# Altium PCB amigaDIP40_v0.7_65816_2025-07-20.pcbdoc (part 1 of 2)
Units mm, origin at the board's own origin, x right, y up, seen from the top; angles counter-clockwise.
Board outline 96.27 x 48.65 mm, 2 copper layers (Top Layer, Bottom Layer); 37 components, 74 nets, 264 pads, 133 vias.
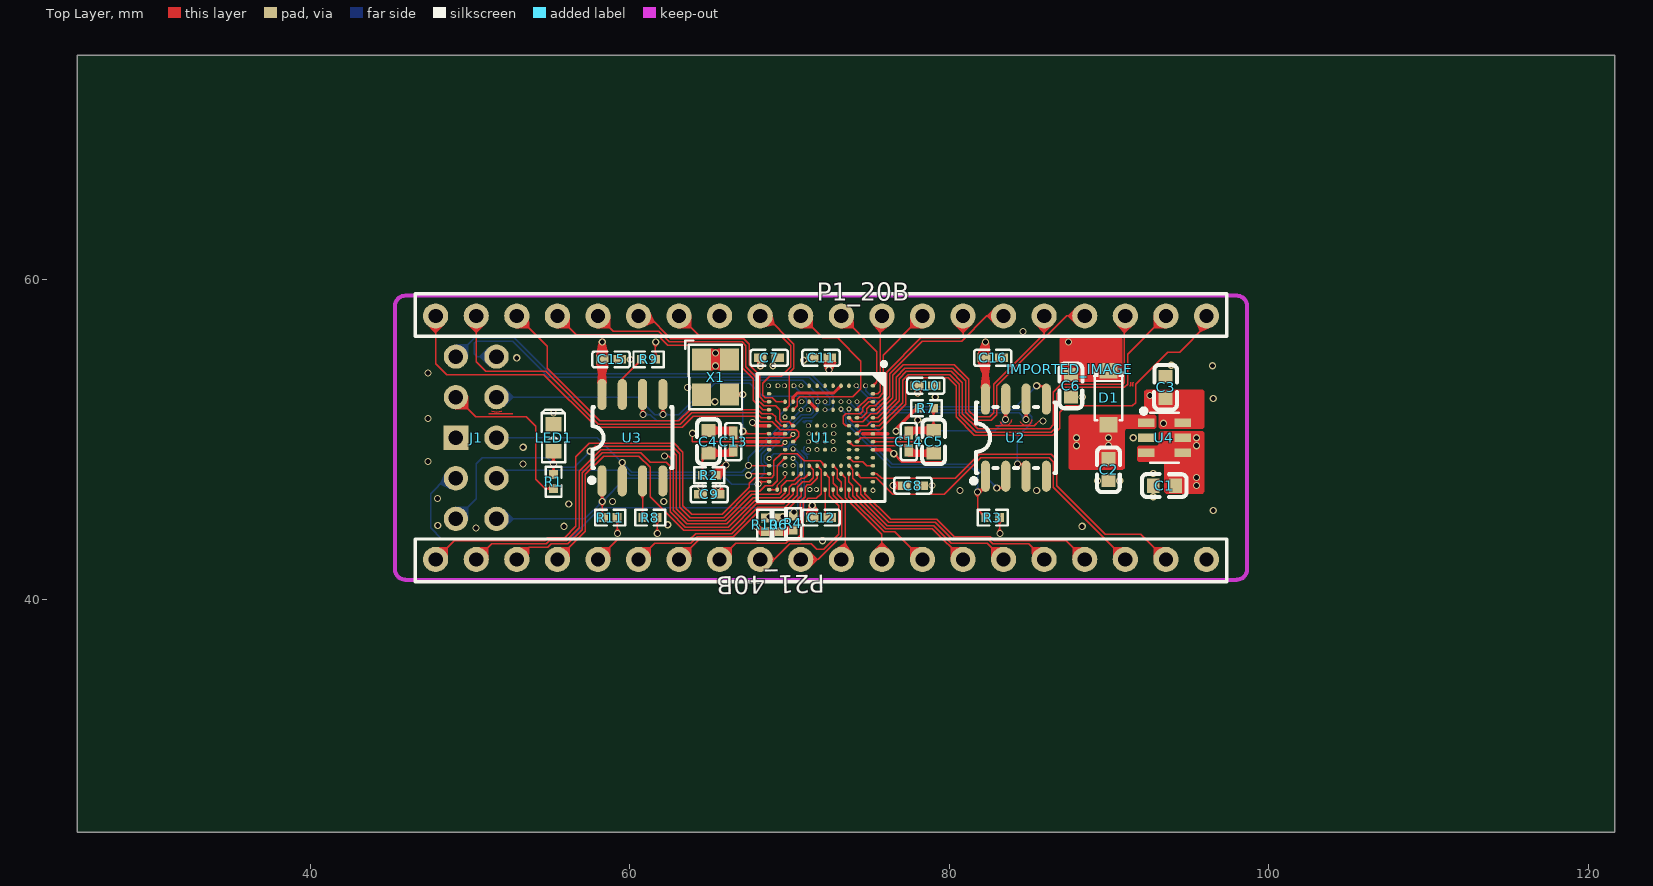
[diagram p0: Top Layer view]
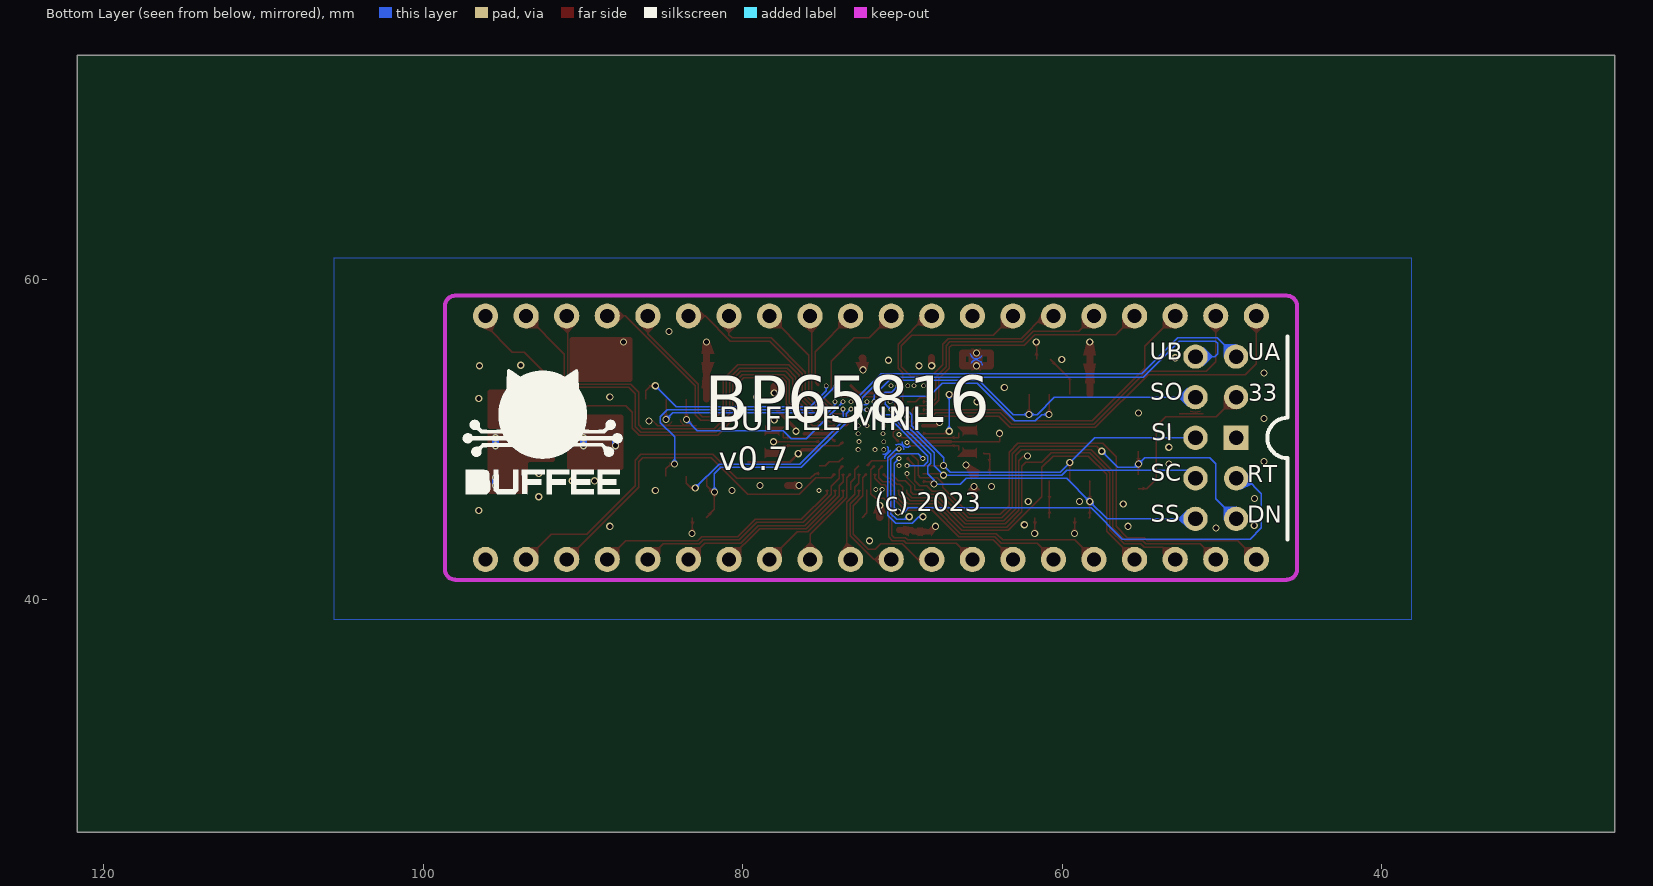
[diagram p1: Bottom Layer view, seen from below]

## Layer stack, top to bottom
Top Layer: signal copper (thickness not stored)
Dielectric: dielectric 0.32, FR-4, Dk 4.8
Bottom Layer: signal copper (thickness not stored)

## Board outline
121.675,25.4 25.4,25.4 25.4,74.05 121.675,74.05

## Components (designator, comment, footprint, x,y, rotation, side; value= is the part's Value field where it differs from the comment)
C1 "4.7u" C0603 93.475,47.1 r0 top
C2 "4.7u" C0603 89.975,48.1 r90 top
C3 "4.7u" C0603 93.545,53.252 r270 top
C4 "4.7u" C0603 64.925,49.85 r270 top
C5 "4.7u" C0603 79.025,49.85 r90 top
C6 "4.7u" C0603 87.625,53.35 r90 top
C7 "0.10u" C0402 68.725,55.1 r180 top
C8 "0.10u" C0402 77.725,47.1 r180 top
C9 "0.10u" C0402 64.975,46.55 r0 top
C10 "0.10u" C0402 78.527,53.351 r180 top
C11 "0.10u" C0402 71.975,55.1 r0 top
C12 "0.10u" C0402 71.975,45.1 r180 top
C13 "0.10u" C0402 66.475,49.85 r270 top
C14 "0.10u" C0402 77.475,49.85 r90 top
C15 "0.10u" C0402 58.825,55 r180 top
C16 "0.10u" C0402 82.725,55.1 r180 top
D1 "MBR130" SOD-123_L2.8-W1.8-LS3.7-RD 89.975,52.6 r270 top
IMPORTED_IMAGE "IMPORTED_IMAGE" IMPORTED_IMAGE 87.537,54.39 r0 top
J1 "HDR-M-2.54_2x5" ICE_PROG 50.385,50.1 r0 top
LED1 "LED-0603_R" LED0603_RED 55.225,50.1 r90 top
P1_20B "HDR-M-2.54_1x20" HDR-M-2.54_1X20 71.975,57.72 r0 top
P21_40B "HDR-M-2.54_1x20" HDR-M-2.54_1X20 71.975,42.48 r180 top
R1 "2K2" R0402 55.225,47.35 r270 top
R2 "100" R0402 64.975,47.75 r180 top
R3 "10K" R0402 82.725,45.1 r180 top
R4 "10K" R0402 70.225,44.75 r90 top
R6 "10K" R0402 69.325,44.65 r90 top
R7 "100" R0402 78.575,51.95 r0 top
R8 "10K" R0402 61.275,45.1 r180 top
R9 "10K" R0402 61.175,55 r180 top
R10 "10K" R0402 68.475,44.65 r90 top
R11 "10K" R0402 58.775,45.1 r180 top
U1 "iCE65L-iCE40HX-TCB132C" LATC-CSBGA-132 71.975,50.1 r270 top
U2 "IS66WVS4M8BLL-104NLI" SOIC-8_L4.9-W3.9-P1.27-LS6.1-BL 84.175,50.1 r0 top
U3 "W25X40CLSNIG" SOIC-8_L5.0-W4.0-P1.27-LS6.0-BL 60.164,50.1 r0 top
U4 "AP7312-1233W6-7" SOT-26_L3.0-W1.6-P0.95-LS2.8-BR 93.475,50.1 r180 top
X1 "100MHz" OSC-SMD_4P-L3.2-W2.5-BL 65.375,53.9 r270 top

## Footprints (in the part's own frame and the unit in brackets; to place one, negate y for a bottom-side part, rotate by r counter-clockwise, add the part's x,y. Pads: shape width x height; smd on the part's side, far side on the other; paste and mask are expansions set on the pad)
C0402 [mm]
  rect 0.79x0.54 smd paste-100 mask+0.051: 1(-0.545,0) 2(0.545,0)
  silkscreen extent -1.17,-0.5 1.17,0.5
C0603 [mm]
  rect 0.8x0.9 smd paste+0 mask+0.051: 1(-0.7,0) 2(0.7,0)
  silkscreen extent -1.41,-0.71 1.39,0.72
HDR-M-2.54_1X20 [mil]
  round 62 hole 35 paste+0 mask+2: 1(-950,0) 2(-850,0) 3(-750,0) 4(-650,0) 5(-550,0) 6(-450,0) 7(-350,0) 8(-250,0) 9(-150,0) 10(-50,0) 11(50,0) 12(150,0) 13(250,0) 14(350,0) 15(450,0) 16(550,0) 17(650,0) 18(750,0) 19(850,0) 20(950,0)
  silkscreen extent -1000,-50 1000,55
ICE_PROG [mil]
  round 60 hole 36 paste+0 mask+2: 1(-50,-200) 2(50,-200) 3(-50,-100) 4(50,-100) 6(50,0) 7(-50,100) 8(50,100) 9(-50,200) 10(50,200)
  rect 62x60 hole 36 paste+0 mask+2: 5(-49.99,0)
IMPORTED_IMAGE [mm]
LATC-CSBGA-132 [mil]
  oval 8.7x11.3 smd paste+0 mask+3: A1(-127.95,127.95) A2(-108.27,127.95) A3(-88.58,127.95) A4(-68.9,127.95) A5(-49.21,127.95) A6(-29.53,127.95) A7(-9.84,127.95) A8(9.84,127.95) A9(29.53,127.95) A10(49.21,127.95) A11(68.9,127.95) A12(88.58,127.95) A13(108.27,127.95) C3(-88.58,88.58) C4(-68.9,88.58) C5(-49.21,88.58) C6(-29.53,88.58) C7(-9.84,88.58) C8(9.84,88.58) C9(29.53,88.58) C10(49.21,88.58) C11(68.9,88.58) D4(-68.9,68.9) D5(-49.21,68.9) D6(-29.53,68.9) D7(-9.84,68.9) D8(9.84,68.9) D9(29.53,68.9) D10(49.21,68.9) L5(-49.21,-68.9) L6(-29.53,-68.9) L7(-9.84,-68.9) L8(9.84,-68.9) L9(29.53,-68.9) L10(49.21,-68.9) L11(68.9,-68.9) M4(-68.9,-88.58) M5(-49.21,-88.58) M6(-29.53,-88.58) M7(-9.84,-88.58) M8(9.84,-88.58) M9(29.53,-88.58) M10(49.21,-88.58) M11(68.9,-88.58) M12(88.58,-88.58) P2(-108.27,-127.95) P3(-88.58,-127.95) P4(-68.9,-127.95) P5(-49.21,-127.95) P6(-29.53,-127.95) P7(-9.84,-127.95) P8(9.84,-127.95) P9(29.53,-127.95) P10(49.21,-127.95) P11(68.9,-127.95) P12(88.58,-127.95) P13(108.27,-127.95) P14(127.95,-127.95)
  oval 11.3x8.7 smd paste+0 mask+3: A14(127.95,127.95) B1(-127.95,108.27) B14(127.95,108.27) C1(-127.95,88.58) C12(88.58,88.58) C14(127.95,88.58) D1(-127.95,68.9) D3(-88.58,68.9) D11(68.9,68.9) D12(88.58,68.9) D14(127.95,68.9) E1(-127.95,49.21) E3(-88.58,49.21) E4(-68.9,49.21) E11(68.9,49.21) E12(88.58,49.21) E14(127.95,49.21) F1(-127.95,29.53) F3(-88.58,29.53) F4(-68.9,29.53) F11(68.9,29.53) F12(88.58,29.53) F14(127.95,29.53) G1(-127.95,9.84) G3(-88.58,9.84) G4(-68.9,9.84) G11(68.9,9.84) G12(88.58,9.84) G14(127.95,9.84) H1(-127.95,-9.84) H3(-88.58,-9.84) H4(-68.9,-9.84) H11(68.9,-9.84) H12(88.58,-9.84) H14(127.95,-9.84) J1(-127.95,-29.53) J3(-88.58,-29.53) J4(-68.9,-29.53) J11(68.9,-29.53) J12(88.58,-29.53) J14(127.95,-29.53) K1(-127.95,-49.21) K3(-88.58,-49.21) K4(-68.9,-49.21) K11(68.9,-49.21) K12(88.58,-49.21) K14(127.95,-49.21) L1(-127.95,-68.9) L3(-88.58,-68.9) L4(-68.9,-68.9) L12(88.58,-68.9) L14(127.95,-68.9) M1(-127.95,-88.58) M3(-88.58,-88.58) M14(127.95,-88.58) N1(-127.95,-108.27) N14(127.95,-108.27) P1(-127.95,-127.95)
  round 10 smd paste+0 mask+3: F6(-29.53,29.53) F7(-9.84,29.53) F8(9.84,29.53) F9(29.53,29.53) G6(-29.53,9.84) G7(-9.84,9.84) G8(9.84,9.84) G9(29.53,9.84) H6(-29.53,-9.84) H7(-9.84,-9.84) H8(9.84,-9.84) H9(29.53,-9.84) J6(-29.53,-29.53) J7(-9.84,-29.53) J8(9.84,-29.53) J9(29.53,-29.53)
  silkscreen extent -187,-157 157,160
LED0603_RED [mm]
  rect 0.9x1 smd paste+0 mask+0.051: 1(-0.85,0) 2(0.85,0)
  silkscreen extent -1.54,-0.73 1.75,0.73
OSC-SMD_4P-L3.2-W2.5-BL [mm]
  rect 1.4x1.2 smd paste+0 mask+0.051: 1(-1.1,-0.875) 2(1.1,-0.875) 3(1.1,0.875) 4(-1.1,0.875)
  silkscreen extent -2.29,-1.9 2.03,1.65
R0402 [mm]
  rect 0.566x0.54 smd paste-100 mask+0.051: 1(-0.433,0) 2(0.433,0)
  silkscreen extent -0.94,-0.5 0.94,0.5
SOD-123_L2.8-W1.8-LS3.7-RD [mm]
  rect 0.95x1.15 smd paste+0 mask+0.051: 1(-1.693,0) 2(1.693,0)
  silkscreen extent -1.63,-0.94 1.41,0.94
SOIC-8_L4.9-W3.9-P1.27-LS6.1-BL [mil]
  oval 22.38x76.78 smd paste+0 mask+2: 1(-75,-95) 2(-25,-95) 3(25,-95) 4(75,-95) 5(75,95) 6(25,95) 7(-25,95) 8(-75,95)
  silkscreen extent -110,-112 98,87
SOIC-8_L5.0-W4.0-P1.27-LS6.0-BL [mil]
  oval 22.38x76.78 smd paste+0 mask+2: 1(-75,-106.5) 2(-25,-106.5) 3(25,-106.5) 4(75,-106.5) 5(75,106.5) 6(25,106.5) 7(-25,106.5) 8(-75,106.5)
  silkscreen extent -106,-111 98,75
SOT-26_L3.0-W1.6-P0.95-LS2.8-BR [mm]
  rect 1.04x0.532 smd paste+0 mask+0.051: 1(1.145,-0.95) 2(1.145,0) 3(1.145,0.95) 4(-1.145,0.95) 5(-1.145,0) 6(-1.145,-0.95)
  silkscreen extent -0.9,-1.82 1.45,1.56

## Via types
v1: diameter 0.45, hole 0.305, Top Layer to Bottom Layer, tented both sides, 93 vias
v2: diameter 0.305, hole 0.205, Top Layer to Bottom Layer, tented both sides, 40 vias

## Nets (pads, with @x,y where several pads share a name; then routed paths per layer and width w, separated by ;. In a path a pad name is that pad's centre, name@x,y a point inside that pad or via, vN(x,y) a via of type N, cw(c..) or ccw(c..) an arc to the next point about the centre after c; other vN are vias at no path point)
+1.2VDC: C3.2 C11.2 C12.2 R2.1 R7.1 U1.F8 U1.G6 U1.H9 U1.J4 U1.J7 U4.6 | length 68.2
  Top Layer w0.2: v1@76.676,50.499 76.676,50.651 77.977,51.949 R7.1@78.142,51.949
  Top Layer w0.4: R2.1@65.409,47.751 65.409,47.784 v1@66.026,48.401
  Top Layer w0.45: v1@71.424,45.848 C12.2@71.429,45.099 ; v1@72.475,54.349 72.475,55.099 C11.2@72.521,55.099
  Mid-Layer 1 w0.178: 70.808,46.257 ccw(c70.808,46.511) 71.062,46.511
  Mid-Layer 1 w0.356: v1(66.025,48.4) cw(c66.025,48) 66.425,48 66.425,47.05 ccw(c67.306,47.05) 67.306,46.169 71.751,46.169 ; 70.799,46.169 cw(c70.799,45.813) 71.155,45.813
  Mid-Layer 1 w0.4: v2(72.725,49.85) 75.076,49.85 ccw(c75.076,52.069) v1@76.645,50.5
  Mid-Layer 1 w0.5: 72.724,53.121 cw(c73.728,53.096) 73.789,54.098
  Mid-Layer 1 w0.8: 72.575,47.65 ccw(c74.172,47.553) 74.132,45.953
  Mid-Layer 1 w1: v1@71.475,45.851 84.411,45.851 84.726,45.851 ccw(c84.726,50.074) 87.713,47.088 ccw(c84.666,50.135) 88.975,50.135 88.975,50.174 cw(c89.801,50.174) 89.801,50.999 v1@93.425,50.999 ; 71.475,54.349 90.974,54.349 ; 90.976,54.349 cw(c90.976,52.75) v1(92.575,52.75)
  other v1: 71.425,45.849 76.676,50.5 93.425,51 72.475,54.35
  other v2: 71.725,49.35 71.225,50.35 72.225,50.85 71.175,51.85
+3.0VDC: C6.2 C15.2 C16.2 D1.1 R3.1 R8.1 R9.1 R11.1 U2.8 U3.8 | length 95.1
  Top Layer w0.09: R11.1@59.209,45.099 v1(59.225,44.1) ; R9.1@61.607,55 61.607,56.082 v1@61.624,56.1 ; R8.1@61.708,45.099 v1@61.726,44.101 ; R3.1@83.159,45.099 83.159,44.118 v1@83.176,44.101
  Top Layer w0.45: U3.8@58.259,52.805 58.259,56.084 v1@58.274,56.1 ; U2.8@82.27,52.513 82.27,56.1 v1@82.275,56.1
  Mid-Layer 1 w0.2: v1(59.225,44.1) v1(83.175,44.1) 94.625,44.1 ccw(c94.625,44.35) 94.875,44.35 94.875,55.9 ccw(c94.675,55.9) 94.675,56.1 v1(87.475,56.1)
  Mid-Layer 1 w0.6: v1(58.275,56.1) v1(87.475,56.1)
  other v1: 61.725,44.1 61.625,56.1 82.275,56.1
+3.3VDC: C2.2 C7.2 C8.2 C9.2 C10.2 D1.2 J1.7 R1.2 R4.1 R6.1 R10.1 U1.A8 U1.A14 U1.E3 U1.F6 U1.F9 U1.H14 U1.J6 U1.J9 U1.K1 U1.L11 U1.M5 U4.1 X1.1 X1.4 | length 52.4
  Top Layer w0.09: J1.7@49.115,52.64 50.354,51.401 53.524,51.401 54.124,50.801 54.124,47.499 54.708,46.917 R1.2@55.226,46.917
  Top Layer w0.1: U1.A8@75.225,49.85 75.226,49.849 v1@78.076,49.849
  Top Layer w0.356: v1@67.926,44.55 68.259,44.217 69.326,44.217 69.425,44.316 R4.1@70.225,44.316
  Top Layer w0.4: C9.2@65.521,46.549 65.526,46.554 v1@65.526,47.05
  Top Layer w0.45: v1(68.174,54.601) 68.18,54.607 C7.2@68.18,55.101 ; v1@76.476,47.1 C8.2@77.18,47.1 ; C10.2@77.982,53.351 78.026,53.306 v1(78.026,52.901) ; X1.1@64.5,54.601 65.376,54.601 66.25,54.601 66.25,55 66.25,55.401 65.376,55.401 64.5,55.401 64.5,55 X1.1@64.5,54.601
  Mid-Layer 1 w0.09: 69.475,48.184 cw(c69.725,48.35) 69.965,48.17 ; 73.527,53.516 cw(c73.775,53.35) 73.978,53.568 ; 73.996,53.588 cw(c74.175,53.35) 74.371,53.126 ; 74.609,53.102 cw(c74.775,53.35) 75.042,53.483 ; 67.447,50.5 ccw(c67.075,50.5) 67.447,50.5 ; 68.047,51.05 ccw(c67.675,51.05) 68.047,51.05 ; 68.397,47.2 ccw(c68.025,47.2) 68.397,47.2 ; 70.025,49.8 ccw(c69.725,49.8) 70.025,49.8 ; 70.525,48.8 ccw(c70.225,48.8) 70.525,48.8 ; 70.525,49.4 ccw(c70.225,49.4) 70.525,49.4 ; 70.525,50.3 ccw(c70.225,50.3) 70.525,50.3
  Mid-Layer 1 w0.3: 70.625,47.25 71.275,47.25 cw(c71.275,46.85) v2@71.675,46.85 ; 70.725,46.8 cw(c71.175,46.8) 71.175,47.25 ; 70.725,47.699 ccw(c71.175,47.7) 71.175,47.25 ; 70.725,48.9 cw(c71.175,48.9) v2(71.175,49.35) cw(c71.175,49.8) 70.725,49.8 ; 70.725,51.3 ccw(c71.175,51.3) v2(71.175,50.85) ; v2(72.775,49.35) cw(c72.775,48.9) 73.225,48.9 ; 73.225,50.4 ccw(c72.775,50.4) v2(72.775,50.85) ccw(c72.775,51.3) 73.225,51.3
  Mid-Layer 1 w0.4: 70.525,50.849 v2@71.175,50.849 ; v2(72.775,49.35) 73.425,49.351 ; v2@72.775,50.849 73.524,50.849
  Mid-Layer 2 w0.45: v1(87.975,49.6) v1(87.975,50.1) ; v1(89.975,49.6) v1(89.975,50.1)
  Bottom Layer w0.45: v1(87.975,49.6) v1(87.975,50.1) ; v1(89.975,49.6) v1(89.975,50.1)
  other v1: 67.925,44.55 65.525,47.05 76.475,47.1 78.075,49.85 65.375,54.6 65.375,55.4
  other v2: 75.225,46.8 71.675,46.85 70.225,48.35 69.725,51.4 73.225,52.35 70.725,53.35
+5.0VDC: C1.2 P1_20B.8 U4.3 U4.4 U4.5 | length 2
  Mid-Layer 2 w0.45: v1(95.475,47.101) v1(95.475,47.6) ; v1(95.475,49.6) v1(95.475,50.1)
  Bottom Layer w0.45: v1(95.475,47.101) v1(95.475,47.6) ; v1(95.475,49.6) v1(95.475,50.1)
CBSEL0: R10.2 U1.L9 | length 7.1
  Bottom Layer w0.09: v1@68.726,45.15 68.975,45.15 69.034,45.091 69.374,44.751 70.426,44.751 70.926,45.251 70.926,48.85 70.375,49.399 v2@70.225,49.399
  other v1: 68.725,45.15
  other v2: 70.225,49.4
CBSEL1: R6.2 U1.P10 | length 7.1
  Bottom Layer w0.09: v2@68.726,48.8 69.026,49.099 70.375,49.099 70.725,48.749 70.725,45.35 70.375,45 69.575,45 v1@69.575,45.15
  other v1: 69.575,45.15
  other v2: 68.725,48.8
CDONE: J1.1 LED1.1 R1.1 U1.M10 | length 31.6
  Top Layer w0.09: R1.1@55.226,47.784 55.226,48.449 LED1.1@55.226,49.249 ; v1@57.525,49.249 57.825,49.549 62.673,49.549 63.123,49.099 63.123,45.749 63.773,45.099 65.874,45.099 67.525,46.75 68.124,46.75 68.475,47.1 68.924,47.1 69.224,47.4 69.224,48.35 U1.M10@69.725,48.85
  Bottom Layer w0.09: J1.1@49.115,45.02 50.375,46.28 50.375,48.454 50.771,48.85 54.825,48.85 55.226,48.449 55.427,48.248 56.524,48.248 v1@57.525,49.249
  other v1: 55.225,48.45 57.525,49.25
CRESET_B: J1.3 R4.2 U1.L10 | length 31.7
  Bottom Layer w0.09: J1.3@49.115,47.56 48.485,47.56 47.525,46.6 47.525,44.451 48.226,43.75 56.227,43.75 58.178,45.701 69.625,45.701 69.874,45.449 70.276,45.449 70.525,45.7 70.525,48.5 v2(70.225,48.8)
  other v1: 70.275,45.45
DAT0: U1.B1 U2.5 | length 13.2
  Top Layer w0.09: v1@85.475,53.349 85.775,53.349 86.08,53.044 U2.5@86.08,52.513
  Bottom Layer w0.09: v2@74.774,53.349 74.774,53.049 75.775,52.051 84.175,52.051 v1@85.475,53.349
  other v1: 85.475,53.35
  other v2: 74.775,53.35
DAT1: U1.D4 U2.2 | length 12.9
  Top Layer w0.09: v1@82.973,46.948 83.225,46.948 83.54,47.263 U2.2@83.54,47.687
  Bottom Layer w0.09: v2(73.725,51.9) 73.725,51.152 76.425,48.449 81.477,48.449 v1@82.976,46.95
  other v1: 82.975,46.95
DAT2: U1.C1 U2.3 | length 16.3
  Top Layer w0.09: v1@84.274,48.449 84.525,48.449 84.81,48.165 U2.3@84.81,47.687
  Bottom Layer w0.09: v2@74.175,53.349 75.676,51.85 84.726,51.85 85.175,51.401 85.175,51.05 84.274,50.151 v1@84.274,48.449
  other v1: 84.275,48.45
  other v2: 74.175,53.35
DAT3: U1.D3 U2.7 | length 12.5
  Top Layer w0.09: v1(83.532,51.243) 83.532,52.505 U2.7@83.54,52.513
  Bottom Layer w0.09: v2(73.725,52.35) 76.026,50.049 76.976,50.049 77.477,50.55 82.839,50.55 v1(83.532,51.243)
DAT_CLK: U1.C3 U2.6 | length 12.4
  Top Layer w0.09: v1(84.802,51.243) 84.802,52.505 U2.6@84.81,52.513
  Bottom Layer w0.09: v2@74.225,52.35 74.225,52.15 74.726,51.649 84.396,51.649 v1(84.802,51.243)
  other v2: 74.225,52.35
DAT_EN: R3.2 U1.E4 U2.1 | length 14.8
  Top Layer w0.09: U2.1@82.27,47.687 82.27,47.095 81.873,46.699 81.774,46.699 81.774,45.617 R3.2@82.292,45.099
  Bottom Layer w0.09: v2(73.225,51.9) 73.524,51.601 73.524,51.05 76.326,48.248 81.375,48.248 81.774,47.85 v1@81.774,46.699
  other v1: 81.775,46.7
GND: C1.1 C2.1 C3.1 C6.1 C7.1 C8.1 C9.1 C10.1 C11.1 C12.1 C15.1 C16.1 J1.5 LED1.2 P21_40B.1 U1.A3 U1.A7 U1.A9 U1.A10 U1.A11 U1.C9 U1.C10 U1.D1 U1.D6 U1.D7 U1.D9 U1.D10 U1.E1 U1.E11 U1.E14 U1.F1 U1.F3 U1.F4 U1.F7 U1.F11 U1.G1 U1.G7 U1.G8 U1.G9 U1.G14 U1.H1 U1.H4 U1.H6 U1.H7 U1.H8 U1.J1 U1.J3 U1.J8 U1.J14 U1.K11 U1.L3 U1.L5 U1.L12 U1.M1 U1.M7 U1.M9 U1.M12 U1.M14 U1.N14 U1.P6 U1.P8 U1.P9 U1.P14 U2.4 U3.4 U4.2 X1.2 | length 61.5
  Top Layer w0.09: 51.177,51.596 52.676,51.596 ; 51.346,51.756 ccw(c51.655,52.64) 51.972,51.759 ; v1@62.176,48.949 62.425,48.949 62.722,48.652 62.722,45.548 63.57,44.7 66.075,44.7 67.726,46.351 69.425,46.351 69.724,46.651 U1.M14@69.724,46.849 ; U1.G14@72.224,46.849 72.224,45.396 C12.1@72.521,45.099 ; U1.F11@72.725,48.35 72.976,48.101 72.976,47.55 73.225,47.301 U1.E14@73.225,46.849 ; U1.D10@73.725,48.85 73.976,48.599 74.576,48.599 74.825,48.35 U1.A11@75.226,48.35 ; U1.D6@73.725,50.849 73.524,50.849 73.374,50.999 73.374,51.449 73.524,51.601 74.426,51.601 74.584,51.759 74.584,51.959 74.975,52.35 U1.A3@75.226,52.35 ; 83.192,51.097 ccw(c83.532,51.243) 83.9,51.209 ; 84.462,51.097 ccw(c84.802,51.243) 85.171,51.209 ; 91.322,53.325 ccw(c91.177,53.451) 91.369,53.451 ; 91.37,53.453 91.37,53.566 ; 91.48,53.44 cw(c91.671,53.448) 91.527,53.574 ; 91.48,53.332 91.48,53.445
  Top Layer w0.1: v1@63.923,50.374 63.923,49.851 66.958,49.851 ; U1.P14@68.711,46.839 U1.N14@69.225,46.85 69.224,47.1 69.724,47.601 U1.M12@69.724,47.85 ; 82.925,50.85 85.325,50.85 85.625,51.15
  Top Layer w0.15: v1(76.525,49.1) 77.05,48.575 79.675,48.575
  Top Layer w0.2: 66.958,49.851 69.324,49.85 ; v1(67.675,51.05) 67.875,50.849 U1.P6@68.726,50.849 ; 69.074,50.35 U1.M7@69.725,50.35 ; U1.L3@70.225,52.35 70.225,52.65 70.474,52.899 72.775,52.899 U1.E1@73.225,53.349 ; U1.J3@71.226,52.35 U1.H4@71.726,51.85 ; 74.576,50.35 76.176,50.349 ; U1.A9@75.225,49.35 76.275,49.351 v1@76.524,49.099
  Mid-Layer 2 w0.09: 65.007,54.633 cw(c65.375,54.6) 65.706,54.765 ; 65.044,55.234 ccw(c65.375,55.4) 65.743,55.366 ; 67.657,47.233 cw(c68.025,47.2) 68.356,47.365 ; 69.79,49.508 ccw(c69.725,49.8) 70.019,49.744 ; 69.977,48.965 cw(c70.225,48.8) 70.463,48.978 ; 69.987,49.221 ccw(c70.225,49.4) 70.473,49.235 ; 74.341,53.598 cw(c74.175,53.35) 74.354,53.112 ; 74.597,53.588 ccw(c74.775,53.35) 74.61,53.102 ; 70.525,49.4 ccw(c70.225,49.4) 70.525,49.4
  Bottom Layer w0.09: 65.007,54.633 cw(c65.375,54.599) 65.706,54.765 ; 65.044,55.235 ccw(c65.375,55.401) 65.743,55.367 ; 69.522,49.582 ccw(c69.725,49.8) 70.017,49.858 ; 69.933,49.342 cw(c70.225,49.4) 70.428,49.618 ; 70.737,49.319 71.015,49.041 cw(c70.752,48.778) 71.123,48.778 ; 70.822,51.072 cw(c71.021,50.872) 71.021,51.155 71.432,51.155 ; 70.927,51.015 cw(c71.175,50.849) 71.378,51.068 ; 70.957,49.553 ccw(c71.176,49.35) 71.233,49.058
  other v1: 72.075,43.65 50.375,44.45 55.875,44.55 88.325,44.55 47.975,44.6 62.373,44.649 96.531,45.549 56.175,45.95 58.925,46.1 62.123,46.099 47.969,46.299 92.775,46.4 80.675,46.8 85.475,46.8 64.425,47.05 78.925,47.1 89.275,47.4 90.675,47.4 92.775,47.85 53.32,48.45 47.369,48.6 62.175,48.95 53.325,49.5 91.525,50.1 63.922,50.374 85.875,51.15 78.026,51.2 47.369,51.3 55.225,51.65 65.325,52.35 96.531,52.551 79.125,52.65 88.325,52.65 63.625,53.25 47.374,54.151 68.974,54.601 96.481,54.601 93.902,54.638 70.875,54.95 60.025,55 52.92,55.101 84.625,56.75
  other v2: 71.275,46.85 69.725,47.85 71.175,49.85 72.775,50.35 69.675,53.35
GNDPLL0: C4.1 C13.1 U1.L7 U1.P1 | length 8
  Top Layer w0.09: C13.1@66.476,50.395 66.476,50.1 70.024,50.1 v2(70.225,50.3)
  Mid-Layer 2 w0.09: v2@68.675,53.349 68.526,53.349 68.526,52 v2(70.225,50.3)
  other v2: 68.675,53.35
GNDPLL1: C5.1 C14.1 U1.D8 | length 4.1
  Top Layer w0.09: U1.D8@73.725,49.85 73.976,49.6 77.474,49.6 C14.1@77.475,49.305
ICE_CLK: U1.P7 X1.3 | length 4.9
  Top Layer w0.09: X1.3@66.25,52.8 v1@67.075,52.8 ; v1@67.075,50.499 67.075,50.349 U1.P7@68.726,50.349
  Bottom Layer w0.09: v1(67.075,50.5) v1(67.075,52.8)
ICE_MISO: J1.8 U1.H3 U1.M11 U3.5 | length 30.4
  Top Layer w0.09: U3.5@62.069,52.805 v1(62.075,51.55)
  Bottom Layer w0.09: J1.8@51.655,52.64 60.484,52.64 61.576,51.55 v1(62.075,51.55) 63.075,51.55 65.224,53.699 70.827,53.699 71.774,52.752 v2(71.775,52.35) 71.774,51.7 71.424,51.35 70.824,51.35 68.424,48.949 68.424,48.599 68.675,48.35 v2(69.725,48.35)
ICE_MOSI: J1.6 U1.K3 U1.P11 U3.2 | length 25
  Top Layer w0.09: v1@59.526,48.551 59.526,47.4 U3.2@59.529,47.395 ; v1(67.424,48.349) U1.P11@68.725,48.35
  Bottom Layer w0.09: J1.6@51.655,50.1 57.974,50.1 60.126,47.951 67.024,47.951 v1(67.424,48.349) ; v1(67.424,48.349) 67.424,48.851 69.425,50.852 69.425,51.55 70.225,52.351 v2@70.776,52.351
  other v1: 59.525,48.55
  other v2: 70.775,52.35
ICE_SCK: J1.4 U1.K4 U1.P12 U3.6 | length 36.8
  Top Layer w0.09: U3.6@60.799,52.805 60.799,51.576 v1(60.825,51.55) ; v1(67.424,47.749) 67.525,47.85 U1.P12@68.726,47.85
  Bottom Layer w0.09: J1.4@51.655,47.56 52.145,48.05 59.722,48.05 60.022,47.751 v1@67.422,47.751 ; v1(60.825,51.55) 61.274,51.55 61.675,51.149 62.976,51.149 65.328,53.501 67.525,53.501 68.325,52.701 70.875,52.701 71.076,52.5 71.076,52.201 70.725,51.85 68.025,49.15 68.025,48.35 v1(67.424,47.749) ; v1(67.424,47.749) v1@67.422,47.751
  other v2: 70.725,51.85
ICE_SS: J1.2 R11.2 U1.L1 U1.P13 U3.1 | length 29.5
  Top Layer w0.09: U3.1@58.259,47.395 58.274,47.38 58.274,46.1 58.274,45.099 R11.2@58.343,45.099 ; v1@68.025,47.199 68.175,47.349 U1.P13@68.726,47.349
  Bottom Layer w0.09: J1.2@51.655,45.02 57.195,45.02 58.274,46.1 59.725,47.55 66.024,47.55 66.374,47.199 68.025,47.199 68.025,47.451 68.424,47.85 68.424,48.299 68.226,48.5 68.226,49.051 70.725,51.55 71.325,51.55 71.475,51.7 71.475,52.551 71.076,52.95 70.674,52.95 v2@70.276,53.349
  other v1: 58.275,46.1 68.025,47.2
  other v2: 70.275,53.35
PIN1: P1_20B.1 U1.L8 | length 28.8
  Top Layer w0.09: P1_20B.1@47.845,57.72 47.845,54.73 48.526,54.05 54.624,54.05 57.924,50.75 63.275,50.75 63.974,51.449 67.825,51.449 68.175,51.101 68.924,51.101 69.425,50.6 70.426,50.6 70.575,50.451 70.575,50.202 U1.L8@70.225,49.85
PIN2: P1_20B.2 U1.P5 | length 23.2
  Top Layer w0.09: P1_20B.2@50.385,57.72 50.385,54.84 50.974,54.25 54.726,54.25 58.025,50.951 63.174,50.951 63.875,51.649 67.926,51.649 68.226,51.35 U1.P5@68.726,51.35
PIN3: P1_20B.3 U1.M6 | length 21.1
  Top Layer w0.09: P1_20B.3@52.925,57.72 54.825,55.82 54.825,54.451 58.124,51.149 63.075,51.149 63.776,51.85 68.025,51.85 68.274,51.601 68.924,51.601 69.125,51.401 69.125,51.2 69.476,50.849 U1.M6@69.724,50.849
PIN4: P1_20B.4 U1.P4 | length 17.2
  Top Layer w0.09: P1_20B.4@55.465,57.72 56.636,56.549 61.726,56.549 62.376,55.899 66.925,55.899 67.075,55.749 67.075,54.449 67.726,53.798 67.726,52.447 68.325,51.85 U1.P4@68.726,51.85
PIN5: P1_20B.5 U1.L6 | length 17
  Top Layer w0.09: P1_20B.5@58.005,57.72 58.975,56.75 61.825,56.75 62.475,56.1 67.027,56.1 67.276,55.848 67.276,54.55 67.926,53.9 67.926,52.549 68.376,52.099 69.125,52.099 69.374,51.85 69.374,51.251 69.524,51.101 69.973,51.101 U1.L6@70.225,50.849
PIN6: P1_20B.6 U1.P3 | length 12
  Top Layer w0.09: P1_20B.6@60.545,57.72 61.155,57.72 62.574,56.3 67.126,56.3 67.474,55.952 67.474,54.652 68.124,54.001 68.124,52.65 68.424,52.35 U1.P3@68.726,52.35
PIN7: P1_20B.7 U1.M3 | length 13.5
  Top Layer w0.09: P1_20B.7@63.085,57.72 64.304,56.501 69.425,56.501 70.075,55.851 70.075,54.55 69.476,53.951 68.775,53.951 68.325,53.501 68.325,52.749 68.475,52.599 68.924,52.599 69.161,52.363 U1.M3@69.712,52.363
PIN8: U1.P2
PIN9: P1_20B.9 U1.M4 | length 7.2
  Top Layer w0.09: P1_20B.9@68.165,57.72 68.508,57.72 70.276,55.952 70.276,54.451 69.976,54.151 69.976,52.099 U1.M4@69.725,51.85
PIN10: P1_20B.10 U1.L4 | length 11.7
  Top Layer w0.09: U1.L4@70.225,51.85 70.474,52.099 70.474,52.5 70.626,52.65 73.974,52.65 74.474,53.151 74.474,54.901 73.024,56.351 72.074,56.351 P1_20B.10@70.705,57.72
PIN11: P1_20B.11 U1.A1 | length 5.4
  Top Layer w0.09: P1_20B.11@73.245,57.72 75.475,55.49 75.475,53.6 U1.A1@75.236,53.361
PIN12: P1_20B.12 U1.A2 | length 5.3
  Top Layer w0.09: U1.A2@75.225,52.85 75.523,52.848 75.676,52.998 75.676,57.72 P1_20B.12@75.785,57.72
PIN13: P1_20B.13 U1.C4 | length 7.9
  Top Layer w0.09: U1.C4@74.225,51.85 74.225,51.901 74.924,52.599 75.574,52.599 75.874,52.899 75.874,55.269 P1_20B.13@78.325,57.72
PIN14: P1_20B.14 U1.C5 | length 10.9
  Top Layer w0.09: U1.C5@74.225,51.35 74.525,51.35 74.825,51.649 74.825,51.901 75.025,52.099 75.376,52.099 76.074,52.8 76.074,54.2 78.226,56.351 80.674,56.351 80.865,56.539 P1_20B.14@80.865,57.72
PIN15: P1_20B.15 U1.A4 | length 11.4
  Top Layer w0.09: U1.A4@75.226,51.85 75.424,51.85 76.275,52.701 76.275,54.101 78.325,56.15 80.776,56.15 82.346,57.72 P1_20B.15@83.405,57.72
PIN16: P1_20B.16 U1.D5 | length 21.4
  Top Layer w0.09: U1.D5@73.725,51.35 73.974,51.101 74.576,51.101 75.076,51.601 75.475,51.601 76.476,52.599 76.476,53.999 77.129,54.652 80.326,54.652 81.228,53.75 81.228,51.799 81.627,51.401 82.529,51.401 82.775,51.647 82.775,53.45 85.945,56.62 P1_20B.16@85.945,57.72
PIN17: P1_20B.17 U1.A5 | length 21.6
  Top Layer w0.09: U1.A5@75.226,51.35 75.523,51.35 76.674,52.5 76.674,53.9 77.225,54.451 80.227,54.451 81.027,53.651 81.027,51.7 81.528,51.2 82.628,51.2 82.976,51.548 82.976,53.349 87.344,57.72 P1_20B.17@88.485,57.72
PIN18: P1_20B.18 U1.C6 | length 28.2
  Top Layer w0.09: U1.C6@74.225,50.849 74.825,50.849 75.076,51.101 75.577,51.101 76.875,52.399 76.875,53.801 77.324,54.25 80.128,54.25 80.827,53.552 80.827,51.601 81.777,50.651 86.28,50.651 86.524,50.895 86.524,52.95 87.024,53.45 90.875,53.45 90.974,53.549 90.974,57.72 P1_20B.18@91.025,57.72
PIN19: P1_20B.19 U1.A6 | length 28.4
  Top Layer w0.09: U1.A6@75.226,50.849 75.625,50.849 77.075,52.3 77.075,53.699 77.426,54.05 80.027,54.05 80.626,53.453 80.626,51.502 81.678,50.451 86.379,50.451 86.725,50.796 86.725,52.851 87.126,53.25 90.974,53.25 91.175,53.45 91.175,55.33 P1_20B.19@93.565,57.72
PIN20: P1_20B.20 U1.C7 | length 31.5
  Top Layer w0.09: U1.C7@74.225,50.349 74.474,50.6 75.676,50.6 77.276,52.201 77.276,53.6 77.527,53.852 79.928,53.852 80.428,53.349 80.428,51.401 81.579,50.25 86.478,50.25 86.925,50.697 86.925,51.698 87.327,52.099 91.475,52.099 91.675,52.3 91.675,53.45 93.674,55.449 94.426,55.449 96.105,57.131 P1_20B.20@96.105,57.72
PIN21: U1.C11
PIN22: P21_40B.2 U1.A12 | length 22.7
  Top Layer w0.09: U1.A12@75.226,47.85 75.475,47.85 75.775,47.55 80.375,47.55 81.876,49.051 86.374,49.051 86.725,48.701 86.725,47.1 89.775,44.05 91.995,44.05 P21_40B.2@93.565,42.48
PIN23: P21_40B.3 U1.C12 | length 21.9
  Top Layer w0.09: U1.C12@74.225,47.85 74.474,47.601 75.424,47.601 76.476,46.549 79.676,46.549 81.975,48.85 86.275,48.85 86.524,48.599 86.524,46.999 P21_40B.3@91.025,42.48
PIN24: P21_40B.4 U1.B14 | length 15.7
  Top Layer w0.09: U1.B14@74.726,46.849 74.726,46.6 76.326,45 79.224,45 80.324,43.9 82.574,43.9 82.826,43.651 87.314,43.651 P21_40B.4@88.485,42.48
PIN25: P21_40B.5 U1.D11 | length 15.3
  Top Layer w0.09: U1.D11@73.725,48.35 73.974,48.101 73.974,47.55 74.474,47.05 74.474,46.549 76.224,44.799 79.125,44.799 80.225,43.699 82.475,43.699 82.724,43.45 84.975,43.45 P21_40B.5@85.945,42.48
PIN26: P21_40B.6 U1.C14 | length 11.2
  Top Layer w0.09: U1.C14@74.225,46.849 74.225,46.501 76.128,44.598 79.029,44.598 80.126,43.501 82.384,43.501 P21_40B.6@83.405,42.48
PIN27: P21_40B.7 U1.D12 | length 10
  Top Layer w0.09: U1.D12@73.725,47.85 73.725,47.349 73.974,47.1 73.974,46.45 76.026,44.398 78.947,44.398 P21_40B.7@80.865,42.48
PIN28: P21_40B.8 U1.D14 | length 6.7
  Top Layer w0.09: U1.D14@73.725,46.85 73.725,46.399 75.925,44.2 76.605,44.2 P21_40B.8@78.325,42.48
PIN29: P21_40B.9 U1.E12 | length 6.4
  Top Layer w0.09: U1.E12@73.225,47.85 73.476,47.601 73.476,46.348 75.785,44.04 P21_40B.9@75.785,42.48
PIN30: P21_40B.10 U1.F12 | length 5.8
  Top Layer w0.09: U1.F12@72.724,47.85 72.724,47.25 72.976,47.001 72.976,46.549 73.476,46.049 73.476,42.681 P21_40B.10@73.275,42.48
PIN31: P21_40B.11 U1.F14 | length 6.3
  Top Layer w0.09: P21_40B.11@70.705,42.48 71.805,42.48 73.275,43.951 73.275,45.95 72.724,46.501 U1.F14@72.725,46.85
PIN32: P21_40B.12 U1.G12 | length 10
  Top Layer w0.09: P21_40B.12@68.165,42.48 69.056,42.48 70.027,43.45 71.373,43.45 71.701,43.123 72.148,43.123 73.075,44.05 73.075,45.851 72.475,46.45 72.475,47.598 U1.G12@72.224,47.85
PIN33: P21_40B.13 U1.H11 | length 11.1
  Top Layer w0.09: P21_40B.13@65.625,42.48 66.646,43.501 69.775,43.501 69.925,43.651 70.626,43.651 70.875,43.9 70.875,46 71.175,46.3 71.675,46.3 71.975,46.6 71.975,48.101 U1.H11@71.726,48.35
PIN34: P21_40B.14 U1.H12 | length 12.6
  Top Layer w0.09: P21_40B.14@63.085,42.48 64.304,43.699 69.676,43.699 69.826,43.849 70.525,43.849 70.674,43.999 70.674,46.1 70.974,46.399 70.974,47.001 71.124,47.151 71.325,47.151 71.726,47.55 U1.H12@71.726,47.85